# Altium PCB PCB_Invernadero.PcbDoc
Units mil, origin at the board's own origin, x right, y up, seen from the top; angles counter-clockwise.
Board outline 2362.2 x 2362.2 mil, 2 copper layers (Top Layer, Bottom Layer); 6 components, 7 nets, 42 pads, 0 vias.
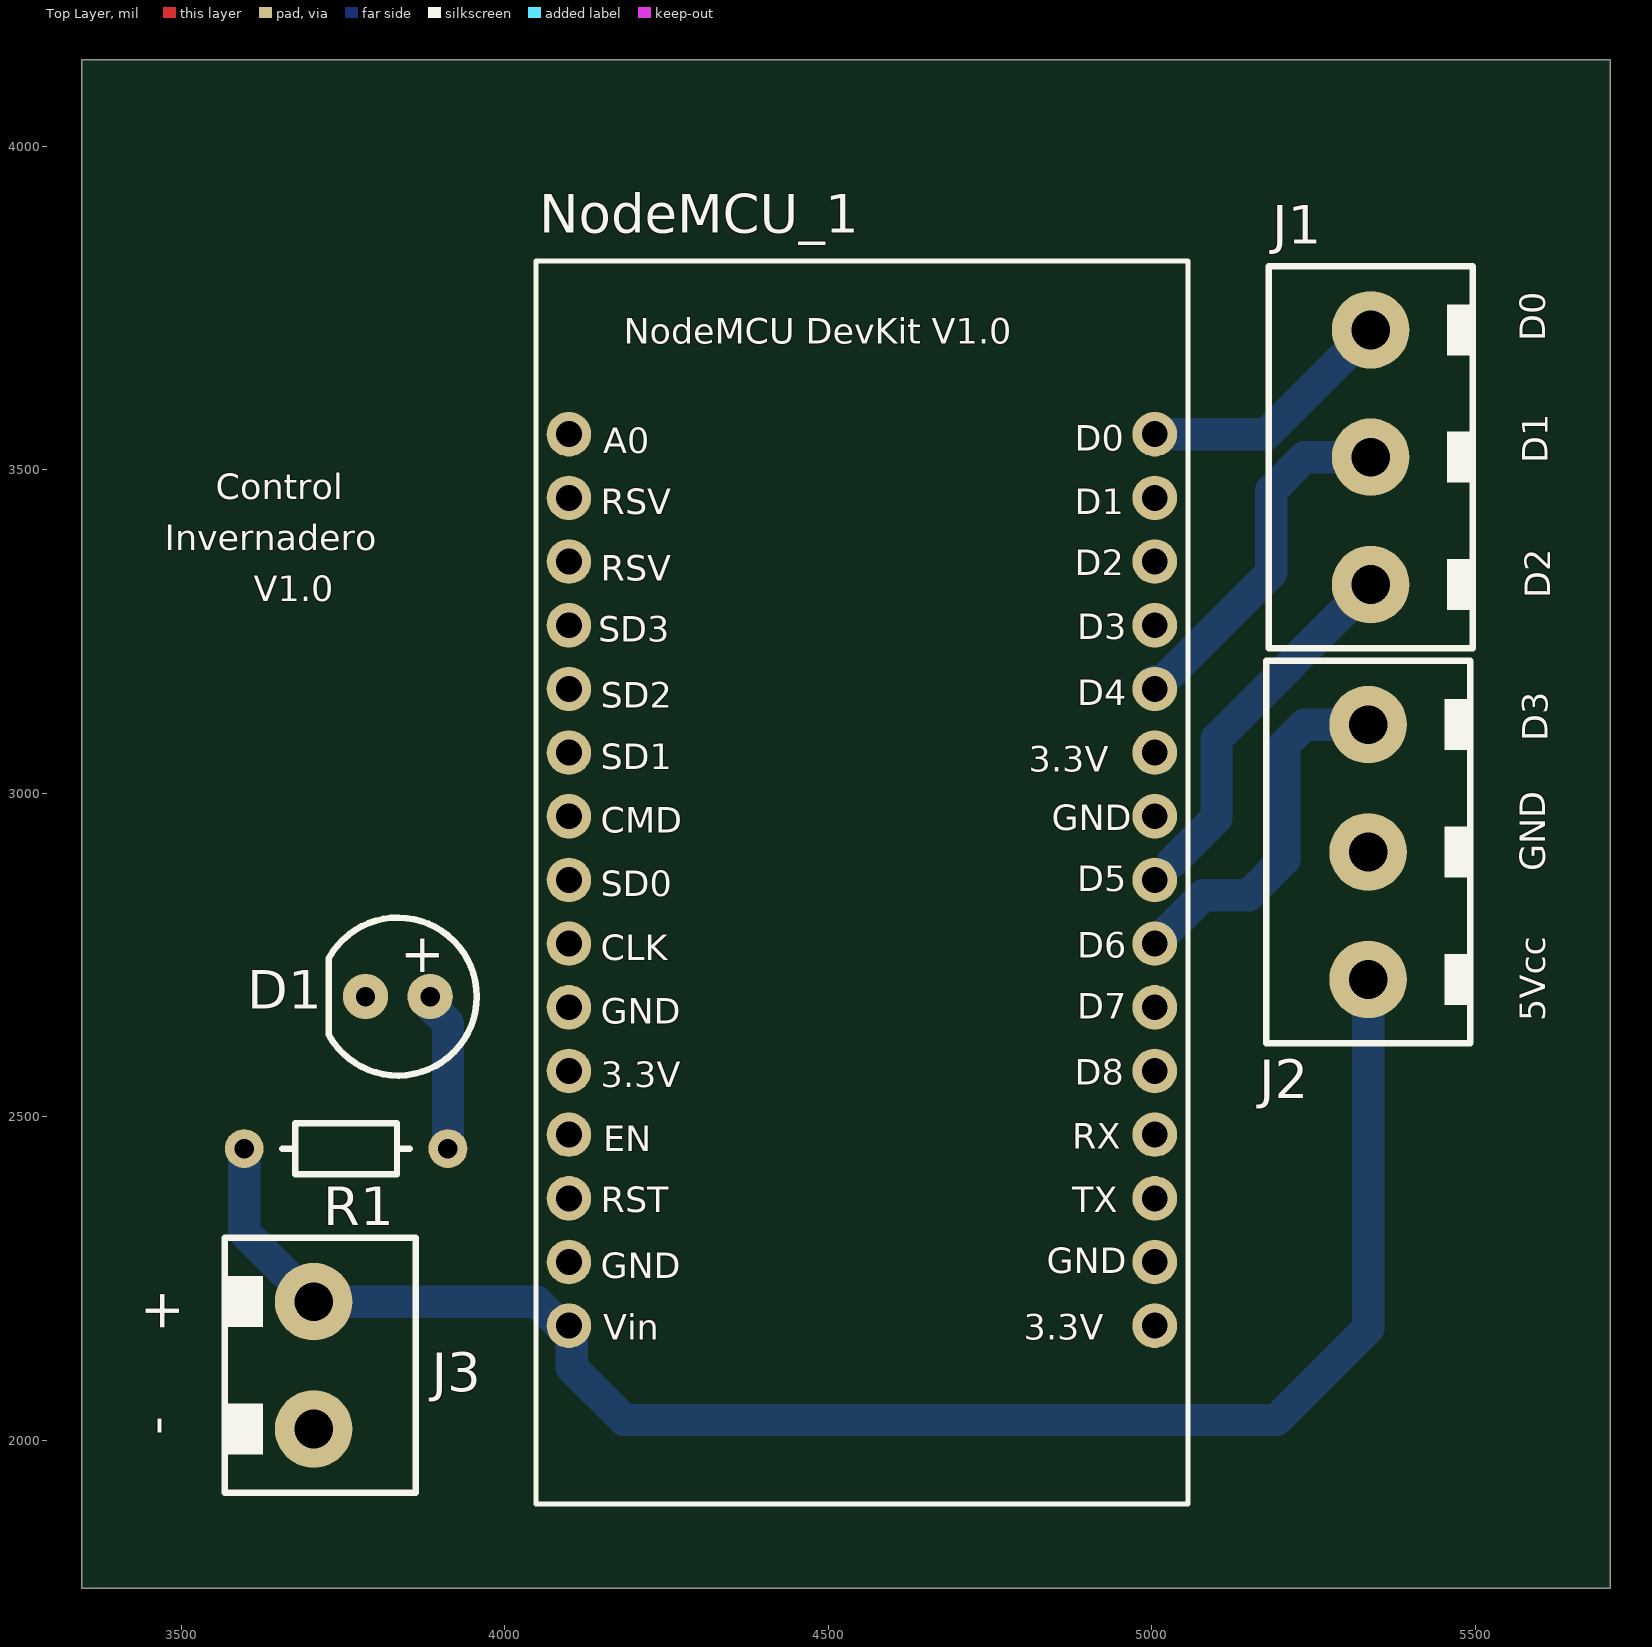
[diagram p0: Top Layer view]
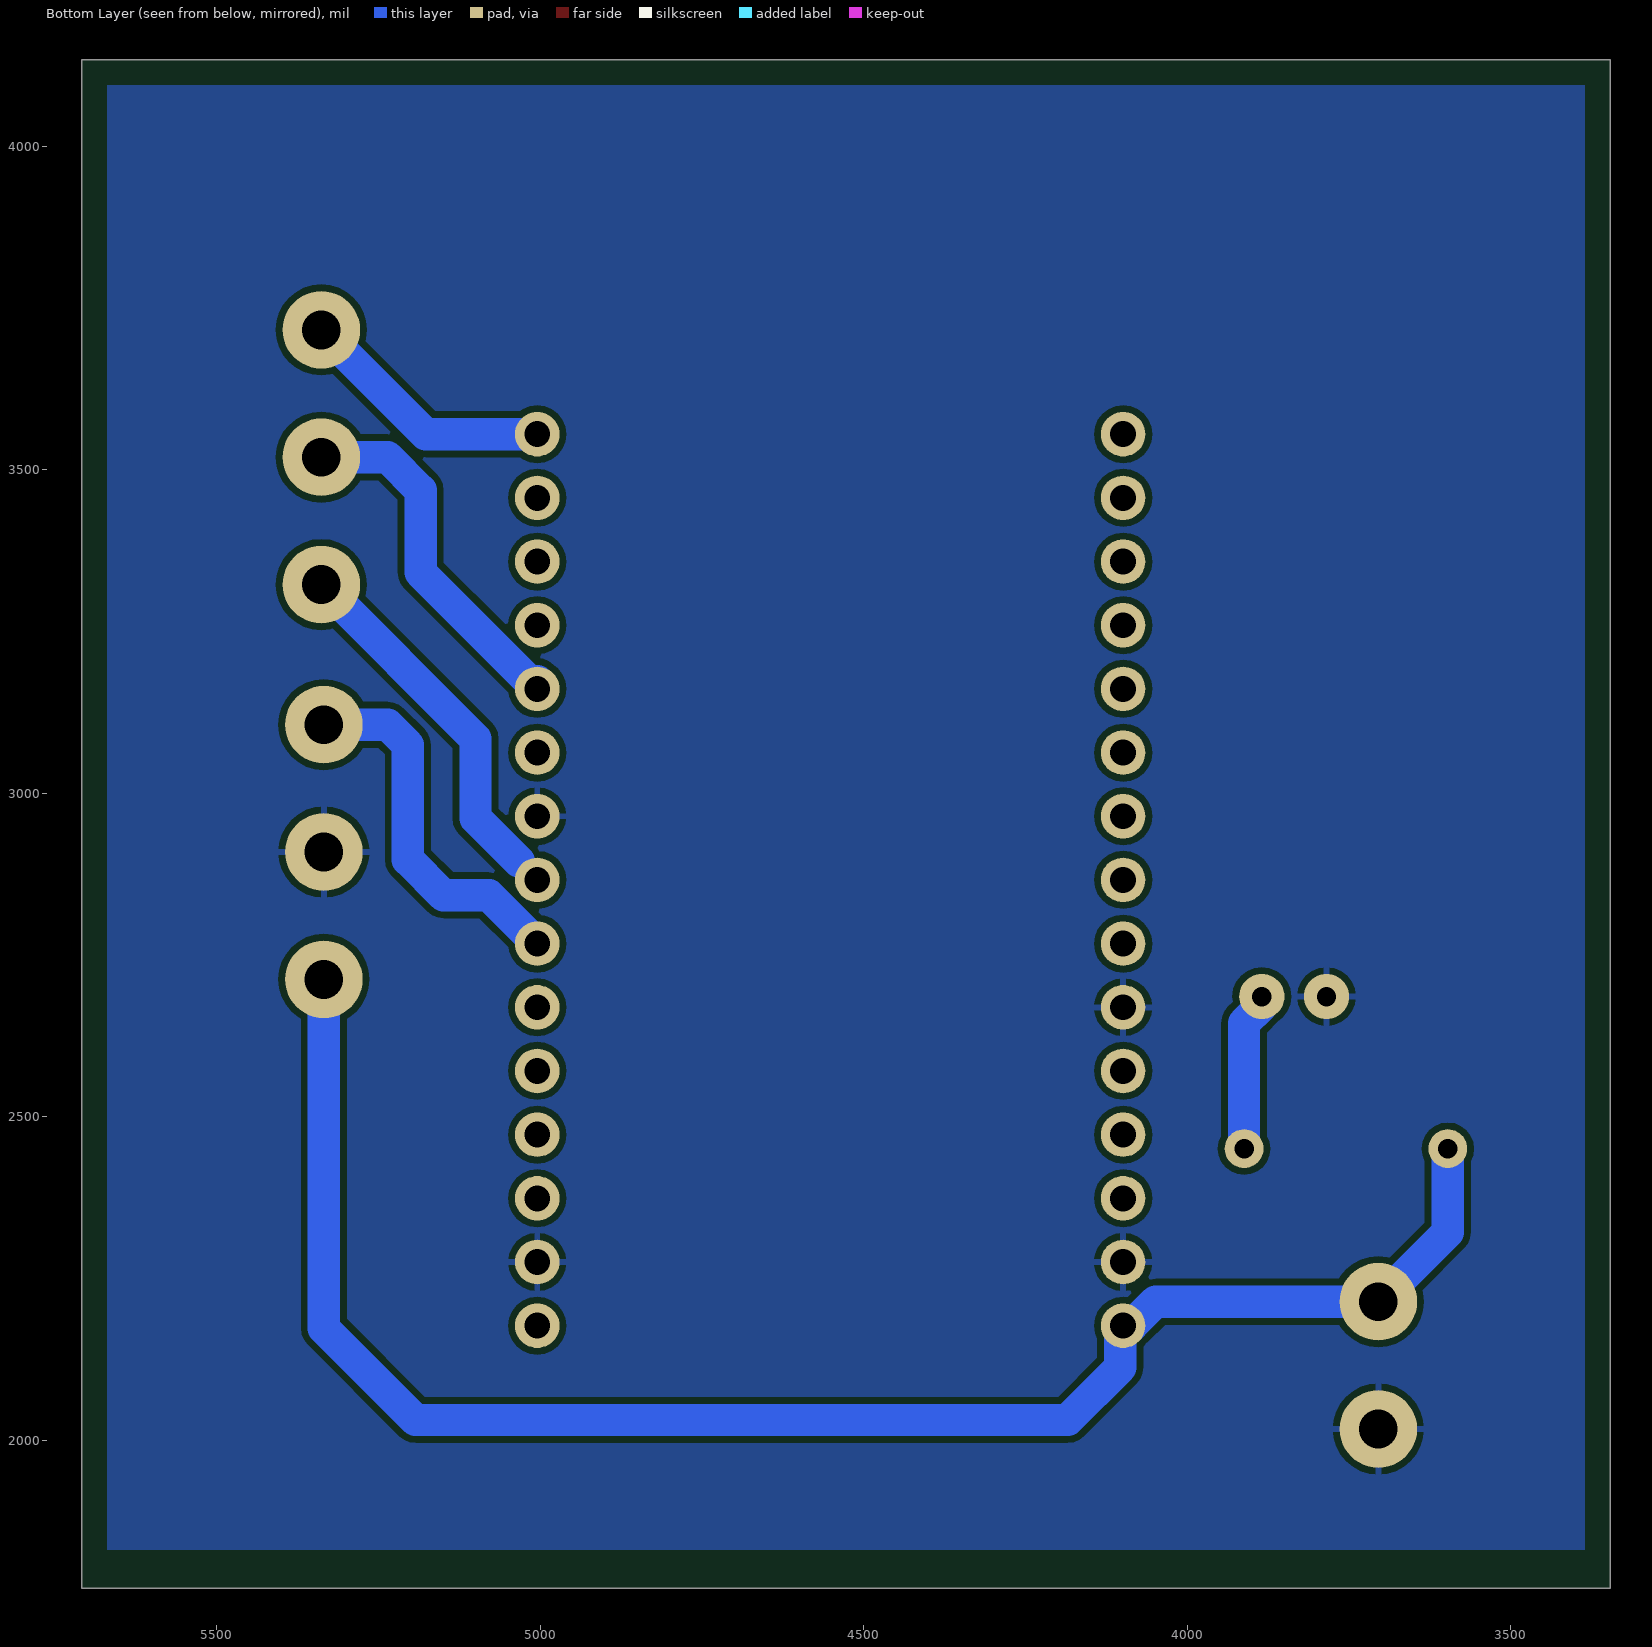
[diagram p1: Bottom Layer view, seen from below]
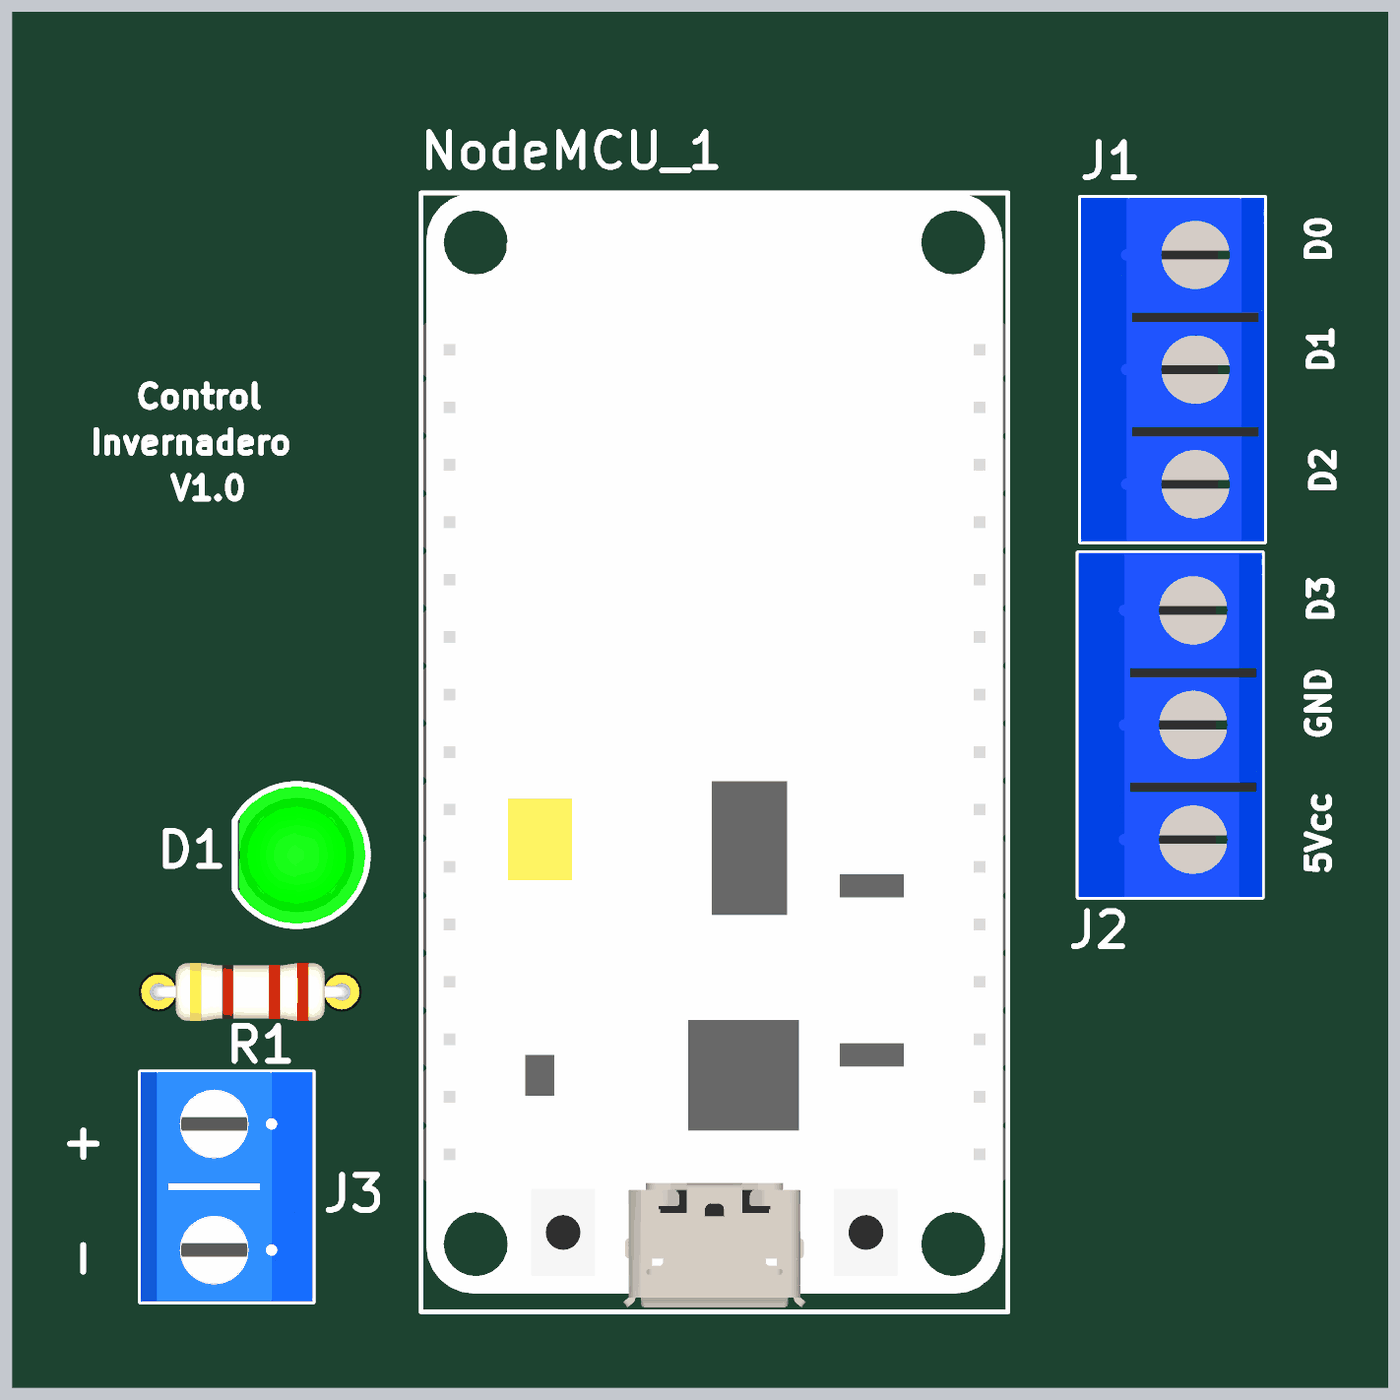
[diagram p2: 3D render of the assembled board from above, using the file's embedded part models]

## Layer stack, top to bottom
Top Solder: solder mask 0.4, Solder Resist, Dk 3.5
Top Layer: signal copper 1.4
Dielectric 1: dielectric 12.6, FR-4, Dk 4.8
Bottom Layer: signal copper 1.4
Bottom Solder: solder mask 0.4, Solder Resist, Dk 3.5

## Board outline
3346.46,1771.65 5708.66,1771.65 5708.66,4133.86 3346.46,4133.86

## Design rules (kind name [scope] priority, off if disabled: settings)
Clearance [All] p1: gap=10 ignorepadtopadclearanceinfootprint=FALSE except(0: Arc-Hole Track-Hole SMDPad-Hole THPad-Hole Via-Hole Fill-Hole Poly-Hole Region-Hole Text-Hole)
PolygonConnect [All] p1: connectstyle=Relief reliefconductorwidth=10 reliefentries=4 polygonreliefangle="90 Angle" airgapwidth=10
RoutingVias [All] p1: holewidth=28 width=50 viastyle="Through Hole" minholewidth=28 minwidth=50 maxholewidth=28 maxwidth=50
SolderMaskExpansion [All] p1: expansion=4 istentingtop=FALSE
Width [All] p1: maxlimit=50 minlimit=20 preferedwidth=40
30 further rules are at their usual default settings.

## Components (designator, comment, footprint, x,y, rotation, side; value= is the part's Value field where it differs from the comment)
D1 "Led_green" Diode_5mm_green 3834.8,2686.02 r180 top
J1 "CONN3" CONN3 5358.27,3421.26 r90 top
J2 "CONN3" CONN3 5354.33,2811.02 r90 top
J3 "CONN2" CONN2 3704.8,2116.02 r270 top
NodeMCU_1 "NodeMCU_DevKit_V1.0" NodeMCU_DevKit_V1.0 4099.29,2177.32 r270 top
R1 "330R" 330R_P8mm_0.25W 3754.8,2451.02 r0 top

## Footprints (in the part's own frame and the unit in brackets; to place one, negate y for a bottom-side part, rotate by r counter-clockwise, add the part's x,y. Pads: shape width x height; smd on the part's side, far side on the other; paste and mask are expansions set on the pad)
330R_P8mm_0.25W [mil]
  round 60 hole 30: 1(-157.48,0) 2(157.48,0)
  silkscreen extent -98,-39 98,39, body extent -167,-50 167,50, height 104
CONN2 [mil]
  round 120 hole 60: 1(-98.43,0) 2(98.43,0)
  silkscreen extent -197,-138 197,157, body extent -197,-138 197,157, height 394
CONN3 [mil]
  round 120 hole 60: 1(-98.43,19.68) 2(98.43,19.68) 3(295.28,19.68)
  silkscreen extent -197,-138 394,177, body extent -197,-138 394,177, height 394
Diode_5mm_green [mil]
  round 70 hole 30: 1(50,0) 2(-50,0)
  silkscreen extent -122,-122 107,122, body extent -118,-118 98,118, height 355
NodeMCU_DevKit_V1.0 [mm]
  round 1.75 hole 1.016: 3.3V(-22.5,23) 3.3V(-10,0) 3.3V(0,23) A0(-35,0) CS(-20,0) D0(-35,23) D1(-32.5,23) D2(-30,23) D3(-27.5,23) D4(-25,23) D5(-17.5,23) D6(-15,23) D7(-12.5,23) D8(-10,23) EN(-7.5,0) GND(-20,23) GND(-12.5,0) GND(-2.5,23) GND(-2.5,0) MISO(-17.5,0) MOSI(-22.5,0) RST(-5,0) RSV(-32.5,0) RSV(-30,0) RX(-7.5,23) SCLK(-15,0) SD2(-25,0) SD3(-27.5,0) TX(-5,23) Vin(0,0)
  silkscreen extent -41.8,-1.3 7,24.3, body extent -41.8,-1.2 6.81,24.2, height 7.37

## Part data
J1 J2: library part Bornera_3_pin
J3: library part Conector
NodeMCU_1: library part NodeMCU
R1: library part 330R_0.25W

## Nets (pads, with @x,y where several pads share a name; then routed paths per layer and width w, separated by ;. In a path a pad name is that pad's centre, name@x,y a point inside that pad or via, vN(x,y) a via of type N, cw(c..) or ccw(c..) an arc to the next point about the centre after c; other vN are vias at no path point)
+5: J2.1 J3.1 NodeMCU_1.Vin R1.1 | length 2620
  Bottom Layer w20: NodeMCU_1.Vin@4086.06,2177.32 NodeMCU_1.Vin NodeMCU_1.Vin@4103.66,2172.95
  Bottom Layer w50: R1.1 3597.32,2321.93 J3.1 4048.93,2214.45 NodeMCU_1.Vin@4086.06,2177.32 ; NodeMCU_1.Vin@4103.66,2172.95 4103.66,2112.87 4185.04,2031.5 5192.91,2031.5 5334.65,2173.23 J2.1
GND: D1.1 J2.2 J3.2 NodeMCU_1.GND | length 34.5
  Bottom Layer w20: NodeMCU_1.GND@5004.8,2964.72 NodeMCU_1.GND@5010.08,2959.45 ; J2.2@5307.59,2909.45 J2.2
NetD1_2: D1.2 R1.2 | length 246.4
  Bottom Layer w20: D1.2@3884.8,2672.49 D1.2
  Bottom Layer w50: D1.2@3884.8,2672.49 3912.28,2645.01 R1.2
NetJ1_1: J1.1 NodeMCU_1.D5 | length 553.9
  Bottom Layer w50: 5033.57,2895.28 5100.19,2961.89 5100.19,3084.44 J1.1
NetJ1_2: J1.2 NodeMCU_1.D4 | length 580.7
  Bottom Layer w50: NodeMCU_1.D4@5004.8,3173.74 NodeMCU_1.D4 5185.04,3341.81 5185.04,3468.5 5236.22,3519.68 J1.2 J1.2@5338.58,3507.52
NetJ1_3: J1.3 NodeMCU_1.D0 | length 400.6
  Bottom Layer w50: NodeMCU_1.D0 5177.32,3555.28 J1.3
NetJ2_3: J2.3 NodeMCU_1.D6 | length 578.2
  Bottom Layer w20: NodeMCU_1.D6 NodeMCU_1.D6@5004.8,2772.17
  Bottom Layer w50: NodeMCU_1.D6 5079.45,2842.52 5149.61,2842.52 5204.72,2897.64 5204.72,3074.9 5236.13,3106.3 J2.3
pads on no net: NodeMCU_1.3.3V NodeMCU_1.A0 NodeMCU_1.CS NodeMCU_1.D1 NodeMCU_1.D2 NodeMCU_1.D3 NodeMCU_1.D7 NodeMCU_1.D8 NodeMCU_1.EN NodeMCU_1.MISO NodeMCU_1.MOSI NodeMCU_1.RST NodeMCU_1.RSV NodeMCU_1.RX NodeMCU_1.SCLK NodeMCU_1.SD2 NodeMCU_1.SD3 NodeMCU_1.TX

## Polygon pours and split planes (outlines as drawn)
GND on Bottom Layer "GND_L02_P000" (solid, pour order 0): 3385.83,4094.49 5669.29,4094.49 5669.29,1830.71 3385.83,1830.71

## Silkscreen, mask and mechanical layers (free items; w line width, h text height)
Top Overlay:
  text "D0" at 5608.11,3698.98 h39.37 r90
  text "D1" at 5612.05,3510 h39.37 r90
  text "Control" at 3553.31,3454.88 h39.37
  text "Invernadero" at 3474.57,3376.14 h39.37
  text "D2" at 5615.98,3301.34 h39.37 r90
  text "V1.0" at 3612.36,3297.4 h39.37
  text "D3" at 5612.05,3080.87 h39.37 r90
  text "GND" at 5608.11,2880.08 h39.37 r90
  text "5Vcc" at 5608.11,2647.8 h39.37 r90
Mechanical 1:
  the board outline again, w7.87

## Text inside footprints (layer, text, board x,y; h text height)
D1: Top Overlay "+" at 3907.32,2775.59 h60 r180
J3: Top Overlay "-" at 3444.58,2037.24 h60 r270; Top Overlay "+" at 3444.89,2234.09 h60 r270
NodeMCU_1: Top Overlay "Vin" at 4152.6,2155.83 h39.37; Top Overlay "GND" at 4148.66,2250.32 h39.37; Top Overlay "RST" at 4148.66,2352.68 h39.37; Top Overlay "EN" at 4152.6,2447.17 h39.37; Top Overlay "3.3V" at 4148.66,2545.59 h39.37; Top Overlay "GND" at 4148.66,2644.02 h39.37; Top Overlay "CLK" at 4148.66,2742.44 h39.37; Top Overlay "SD0" at 4148.66,2840.87 h39.37; Top Overlay "CMD" at 4148.66,2939.29 h39.37; Top Overlay "SD1" at 4148.66,3037.72 h39.37; Top Overlay "SD2" at 4148.66,3132.2 h39.37; Top Overlay "SD3" at 4144.72,3234.57 h39.37; Top Overlay "RSV" at 4148.66,3329.05 h39.37; Top Overlay "RSV" at 4148.66,3431.42 h39.37; Top Overlay "A0" at 4152.6,3525.91 h39.37; Top Overlay "3.3V" at 4802.2,2155.83 h39.37; Top Overlay "TX" at 4877.01,2352.68 h39.37; Top Overlay "GND" at 4837.64,2258.19 h39.37; Top Overlay "RX" at 4877.01,2451.1 h39.37; Top Overlay "D8" at 4880.94,2549.53 h39.37; Top Overlay "D7" at 4884.88,2651.89 h39.37; Top Overlay "D6" at 4884.88,2746.38 h39.37; Top Overlay "D5" at 4884.88,2848.74 h39.37; Top Overlay "GND" at 4845.51,2943.23 h39.37; Top Overlay "3.3V" at 4810.08,3033.78 h39.37; Top Overlay "D4" at 4884.88,3136.14 h39.37; Top Overlay "D3" at 4884.88,3238.5 h39.37; Top Overlay "D2" at 4880.94,3336.93 h39.37; Top Overlay "D1" at 4880.94,3431.42 h39.37; Top Overlay "D0" at 4880.94,3529.84 h39.37; Top Overlay "NodeMCU DevKit V1.0" at 4184.09,3695.2 h39.37